# Altium PCB MT6816_Angle_Encoder.PcbDoc
Units mil, origin at the board's own origin, x right, y up, seen from the top; angles counter-clockwise.
Board outline 1496.06 x 1496.06 mil, 2 copper layers (Top Layer, Bottom Layer); 25 components, 21 nets, 90 pads, 18 vias.
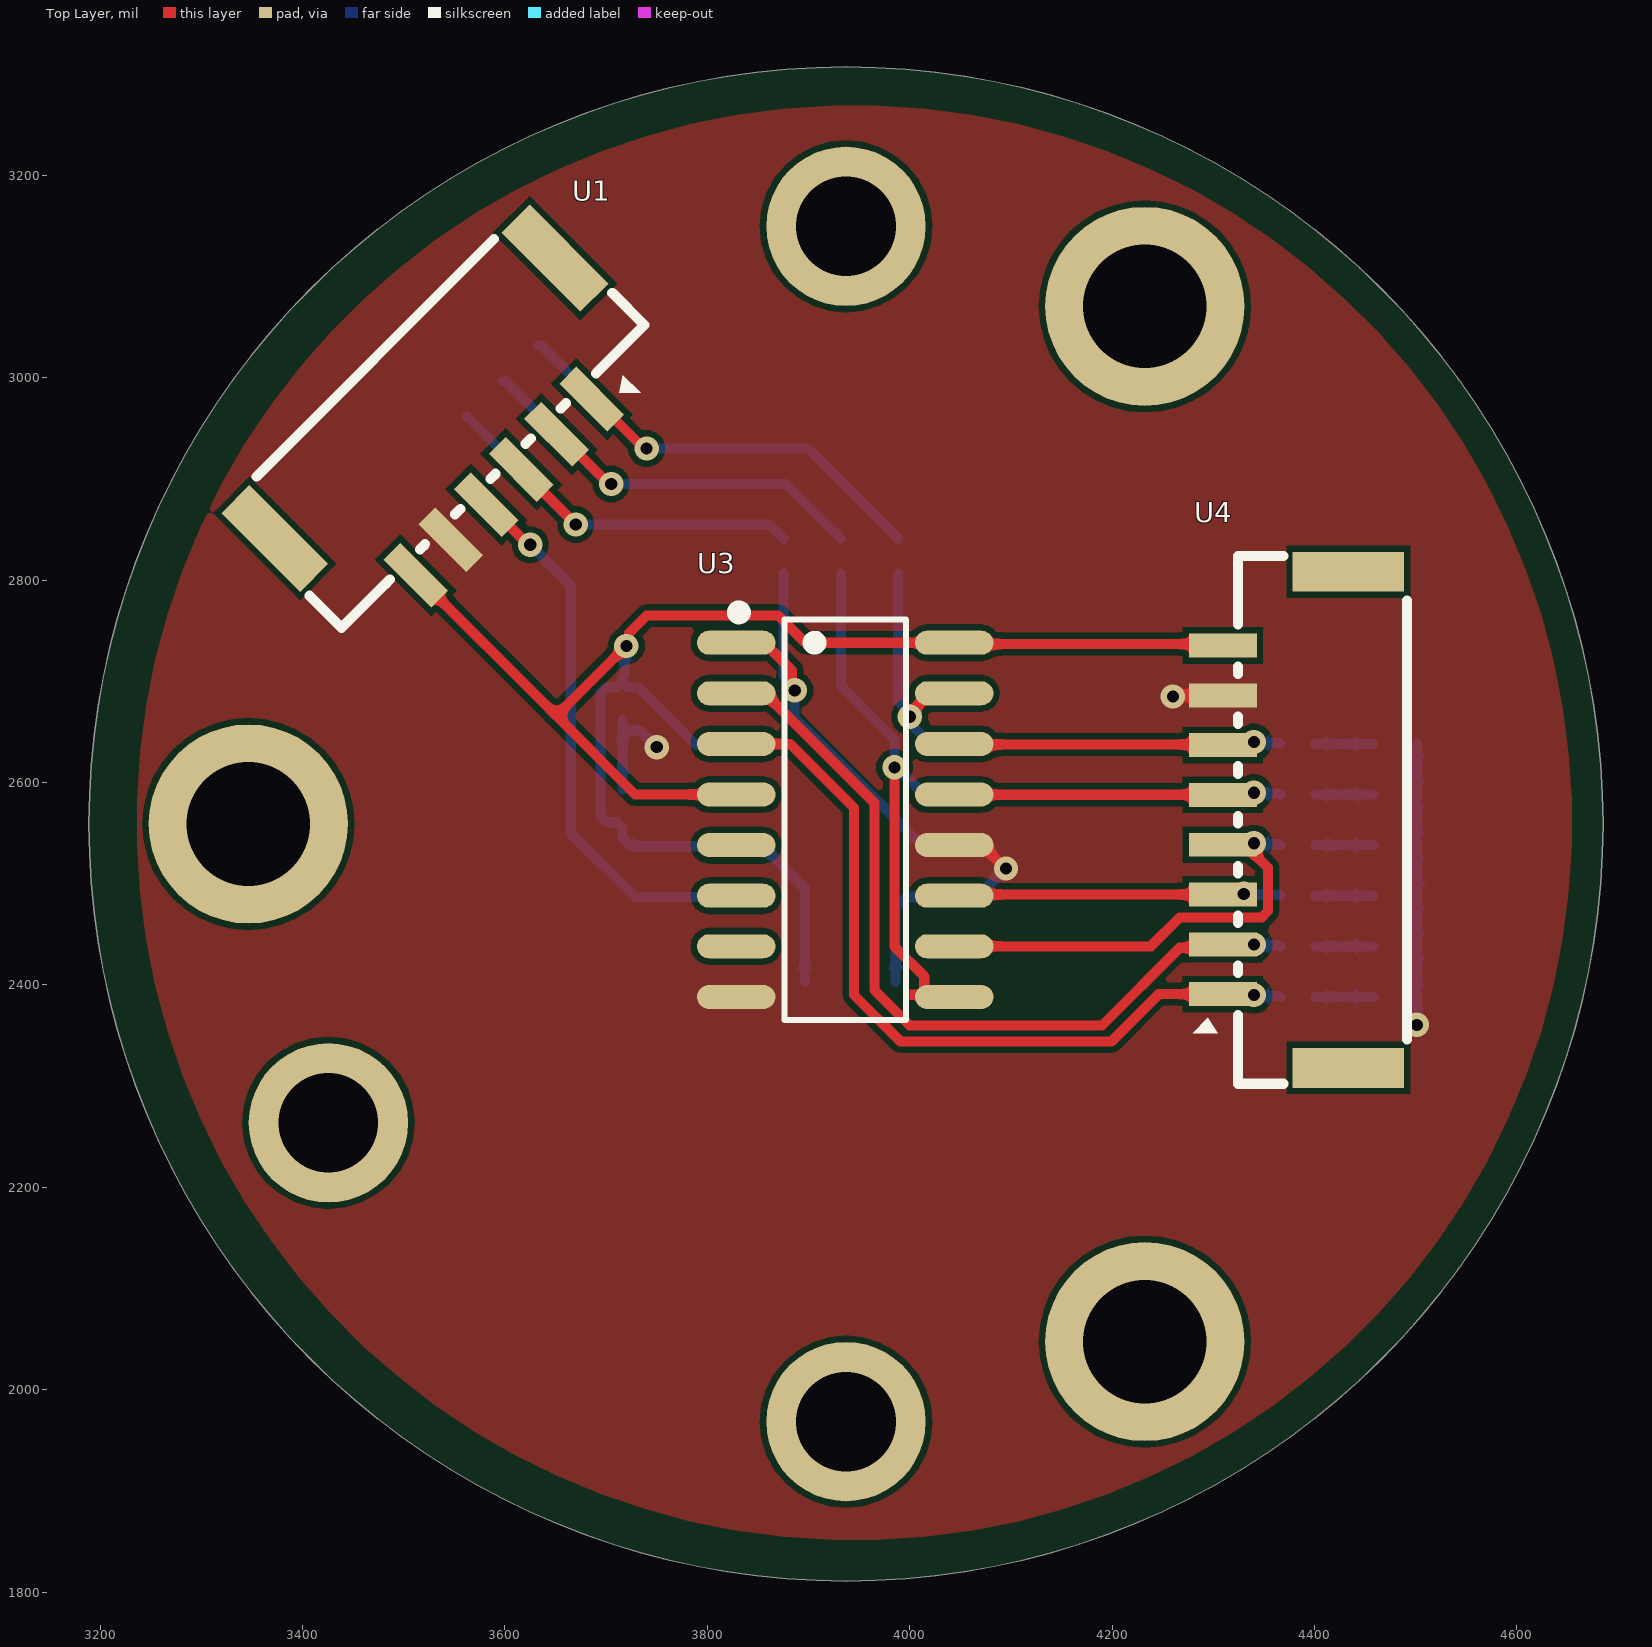
[diagram p0: Top Layer view]
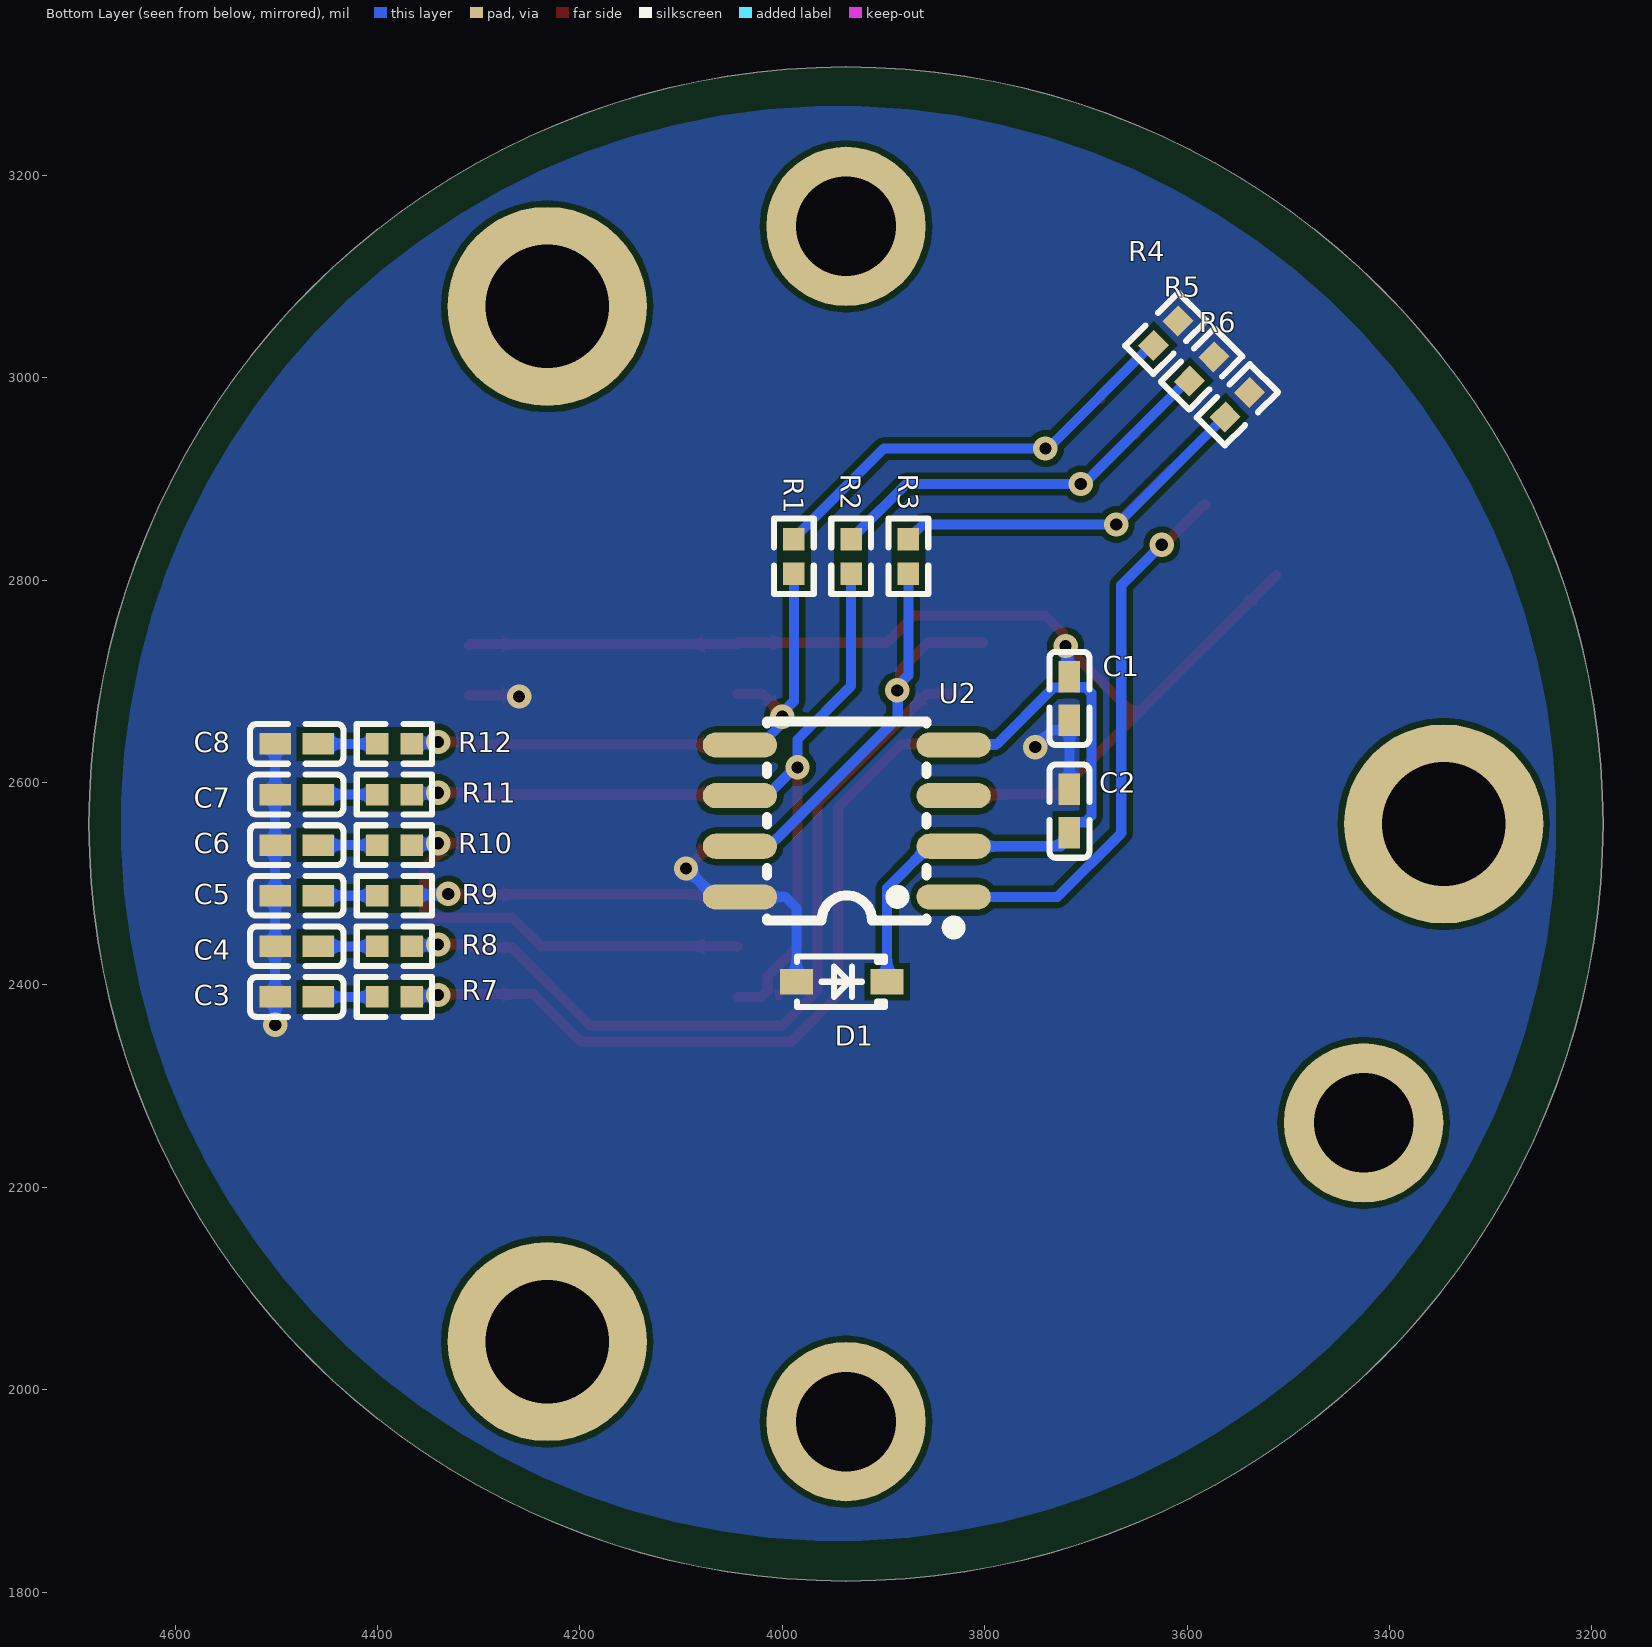
[diagram p1: Bottom Layer view, seen from below]

## Layer stack, top to bottom
Top Solder: solder mask 0.4, Solder Resist, Dk 3.5
Top Layer: signal copper 1.4
Dielectric 1: dielectric 12.6, FR-4, Dk 4.8
Bottom Layer: signal copper 1.4
Bottom Solder: solder mask 0.4, Solder Resist, Dk 3.5

## Board outline
3188.98,2559.06 ccw(c3937.01,2559.06) 3937.01,1811.02 ccw(c3937.01,2559.06) 4685.04,2559.06 ccw(c3937.01,2559.06) 3937.01,3307.09 ccw(c3937.01,2559.06)

## Design rules (kind name [scope] priority, off if disabled: settings)
Clearance [All] p1: gap=6 ignorepadtopadclearanceinfootprint=FALSE except(0: Arc-Hole Track-Hole SMDPad-Hole THPad-Hole Via-Hole Fill-Hole Poly-Hole Region-Hole Text-Hole)
HoleSize [All] p1: absolutevalues=TRUE maxlimit=10000 minlimit=1 maxpercent=80.000 minpercent=20.000
HoleToHoleClearance [All] p1: gap=5 allowstackedmicrovias=TRUE
MinimumSolderMaskSliver [All] p1: minsoldermaskwidth=2
PlaneConnect [All] p1: planeconnectstyle=Direct reliefexpansion=20 reliefentries=4 reliefconductorwidth=10 reliefairgap=10
PolygonConnect [All] p1: connectstyle=Direct reliefconductorwidth=10 reliefentries=4 polygonreliefangle="90 Angle" airgapwidth=10
RoutingVias [All] p1: holewidth=12 width=24 viastyle="Through Hole" minholewidth=12 minwidth=24 maxholewidth=28 maxwidth=50
SilkToSilkClearance [All] p1: silktosilkclearance=0
SilkToSolderMaskClearance [IsPad] p1: minsilkscreentomaskgap=0 clearancetoexposedcopper=TRUE
SolderMaskExpansion [All] p1: expansion=4 istentingtop=FALSE
Width [All] p1: maxlimit=10 minlimit=10 preferedwidth=10
24 further rules are at their usual default settings.

## Components (designator, comment, footprint, x,y, rotation, side; value= is the part's Value field where it differs from the comment)
C1 "0.1uf" C0402 3716.22,2683.19 r90 bottom
C2 "0.1uf" C0402 3716.22,2571.73 r270 bottom
C3 "0.1uf" C0402 4479.72,2388.19 r180 bottom
C4 "0.1uf" C0402 4479.72,2438.19 r180 bottom
C5 "0.1uf" C0402 4479.72,2488.19 r180 bottom
C6 "0.1uf" C0402 4479.72,2538.19 r180 bottom
C7 "0.1uf" C0402 4479.72,2588.19 r180 bottom
C8 "0.1uf" C0402 4479.72,2638.19 r180 bottom
D1 "BZT52C5V6S_C19077441" SOD-323_L1.7-W1.3-LS2.6-RD 3941.22,2403.19 r0 bottom
R1 "0" R0402 3988.54,2823.54 r270 bottom
R2 "0" R0402 3931.97,2823.54 r270 bottom
R3 "0" R0402 3875.4,2823.54 r270 bottom
R4 "10kΩ" R0402 3620.99,3044 r315 bottom
R5 "10kΩ" R0402 3585.64,3008.65 r315 bottom
R6 "10kΩ" R0402 3550.28,2973.29 r315 bottom
R7 "10Ω" R0402 4383.26,2388.19 r180 bottom
R8 "10Ω" R0402 4383.26,2438.19 r180 bottom
R9 "10Ω" R0402 4383.26,2488.19 r180 bottom
R10 "10Ω" R0402 4383.26,2538.19 r180 bottom
R11 "10Ω" R0402 4383.26,2588.19 r180 bottom
R12 "10Ω" R0402 4383.26,2638.19 r180 bottom
U1 "BX-GH1.25-6PWT" CONN-SMD_6P-P1.25_BX-GH1.25-6PWT 3545.18,2945.51 r225 top
U2 "MT6816CT-STD" SOP-8_L4.9-W3.9-P1.27-LS6.0-BL 3936.22,2558.19 r90 bottom locked
U3 "AM26LS31CD" SOIC-16_L9.9-W3.9-P1.27-LS6.0-BL 3936.22,2568.19 r270 top locked
U4 "BX-GH1.25-8PWT" CONN-SMD_8P-P1.25_BX-GH1.25-8PWT 4386.22,2563.19 r90 top

## Footprints (in the part's own frame and the unit in brackets; to place one, negate y for a bottom-side part, rotate by r counter-clockwise, add the part's x,y. Pads: shape width x height; smd on the part's side, far side on the other; paste and mask are expansions set on the pad)
C0402 [mm]
  rect 0.79x0.54 smd paste-100 mask+0.051: 1(-0.545,0) 2(0.545,0)
  silkscreen extent -1.17,-0.5 1.17,0.5
CONN-SMD_6P-P1.25_BX-GH1.25-6PWT [mm]
  rect 0.6x1.7 smd paste+0 mask+0.05: 1(-3.126,1.925) 2(-1.876,1.925) 3(-0.626,1.925) 4(0.624,1.925) 5(1.874,1.925) 6(3.124,1.925)
  rect 1x2.8 smd paste+0 mask+0.05: 7(4.974,-1.225) 8(-4.976,-1.225)
  silkscreen extent -5.37,-2.65 5.37,2.69
CONN-SMD_8P-P1.25_BX-GH1.25-8PWT [mm]
  rect 0.6x1.7 smd paste+0 mask+0.05: 1(-4.375,1.95) 2(-3.125,1.95) 3(-1.875,1.95) 4(-0.625,1.95) 5(0.625,1.95) 6(1.875,1.95) 7(3.125,1.95) 8(4.375,1.95)
  rect 1x2.8 smd paste+0 mask+0.05: 9(6.225,-1.2) 10(-6.225,-1.2)
  silkscreen extent -6.62,-2.67 6.62,2.71
R0402 [mm]
  rect 0.566x0.54 smd paste-100 mask+0.051: 1(-0.433,0) 2(0.433,0)
  silkscreen extent -0.94,-0.5 0.94,0.5
SOD-323_L1.7-W1.3-LS2.6-RD [mm]
  rect 0.83x0.63 smd paste+0 mask+0.05: 1(-1.14,0) 2(1.14,0)
  silkscreen extent -1.08,-0.64 1.13,0.64
SOIC-16_L9.9-W3.9-P1.27-LS6.0-BL [mil]
  oval 23.7x77.6 smd paste+0 mask+2: 1(-169.99,-107.7) 2(-119.99,-107.7) 3(-69.99,-107.7) 4(-19.99,-107.7) 5(30.01,-107.7) 6(80.01,-107.7) 7(130.01,-107.7) 8(180.01,-107.7) 9(180.01,107.7) 10(130.01,107.7) 11(80.01,107.7) 12(30.01,107.7) 13(-19.99,107.7) 14(-69.99,107.7) 15(-119.99,107.7) 16(-169.99,107.7)
  silkscreen extent -206,-111 203,60
SOP-8_L4.9-W3.9-P1.27-LS6.0-BL [mm]
  oval 0.63x1.865 smd paste+0 mask+0.051: 1(-1.807,-2.682) 2(-0.537,-2.682) 3(0.733,-2.682) 4(2.003,-2.682) 5(2.003,2.682) 6(0.733,2.682) 7(-0.537,2.682) 8(-1.807,2.682)
  silkscreen extent -2.72,-2.83 2.6,2

## Part data
C1 C2 C3 C4 C5 C6 C7 C8: library part CC0402KRX6S5BB225
R1 R2 R3 R4 R5 R6 R7 R8 R9 R10 R11 R12: library part PTFR0402B30K0P9

## Free pads (board coordinates)
  round 196.85 hole 122.05: 1(3346.46,2559.06) 1(4232.28,2047.62) 1(4232.28,3070.49)
  round 157.48 hole 98.43: 1(3425.58,2263.78) 1(3937.01,1968.5) 1(3937.01,3149.61)

## Via types
v1: diameter 24, hole 12, Top Layer to Bottom Layer, tented both sides, 18 vias

## Nets (pads, with @x,y where several pads share a name; then routed paths per layer and width w, separated by ;. In a path a pad name is that pad's centre, name@x,y a point inside that pad or via, vN(x,y) a via of type N, cw(c..) or ccw(c..) an arc to the next point about the centre after c; other vN are vias at no path point)
A+: R12.2 U3.14 U4.6 | length 324.8
  Top Layer w10: U3.14 4044.5,2637.59 4308.87,2637.59 U4.6 4312.44,2640 v1(4340,2640)
  Bottom Layer w10: v1(4340,2640) 4340.91,2639.09 4365.31,2639.09 R12.2
A-: R11.2 U3.13 U4.5 | length 324.1
  Top Layer w10: U3.13 4044.11,2587.98 4309.26,2587.98 U4.5 4311.65,2590 v1(4340,2590)
  Bottom Layer w10: v1(4340,2590) 4340.91,2589.09 4365.31,2589.09 R11.2
A/SPI_MOSI: R1.2 U2.5 U3.15 | length 256.4
  Top Layer w10: v1(4000,2665) 4000,2668.1 4020.07,2688.17 U3.15
  Bottom Layer w10: R1.2 3988.54,2680.25 4000,2668.79 v1(4000,2665) ; v1@4002.68,2662.32 4002.68,2655.88 4021.53,2637.04 U2.5 U2.5@4042.85,2636.02
B+: R10.2 U3.10 U4.4 | length 452.3
  Top Layer w10: U3.10 4238.17,2438.17 4266.56,2466.56 4347.47,2466.56 4353.91,2473 4353.91,2515.77 U4.4@4334.84,2534.84 ; U4.4 4310.87,2540 v1(4340,2540)
  Bottom Layer w10: v1(4340,2540) 4340.91,2539.09 4365.31,2539.09 R10.2
B-: R9.2 U3.11 U4.3 | length 323.8
  Top Layer w10: U3.11 4045.11,2489.37 4329.37,2489.37 v1(4330,2490)
  Bottom Layer w10: v1(4330,2490) 4330.91,2489.09 4365.31,2489.09 R9.2
B/SPI_MISO: R2.2 U2.6 U3.9 | length 546.7
  Top Layer w10: v1(3985,2615) 3985,2437.83 4014.35,2408.48 4014.35,2394.5 4020.68,2388.17 U3.9
  Bottom Layer w10: R2.2 3931.97,2695.56 3985,2642.53 v1(3985,2615) 3987.28,2615 4015.24,2587.04 U2.6
GND: C1.1 C2.1 C3.1 C4.1 C5.1 C6.1 C7.1 C8.1 D1.2 R4.1 R5.1 R6.1 U1.5 U2.8 U3.8 U3.12 U4.7 | length 697.6
  Top Layer w10: U3.12 4071.35,2538.17 4094.52,2515 v1(4095,2515) ; v1(4260,2685) 4261.22,2686.22 U4.7
  Bottom Layer w10: C2.1 C1.1@3716.22,2656.81 ; C1.1 C1.1@3716.22,2656.81 ; v1(3750,2635) 3733.44,2651.56 3721.47,2651.56 C1.1@3716.22,2656.81 ; D1.2 3986.1,2476.1 3997.04,2487.04 4066.59,2487.04 4094.55,2515 v1(4095,2515) ; v1(4501.01,2360.62) 4501.01,2388.02 C3.1 C4.1 C5.1 C6.1 C7.1 C8.1
NetC3_2: C3.2 R7.1 | length 58
  Bottom Layer w10: R7.1 C3.2
NetC4_2: C4.2 R8.1 | length 58
  Bottom Layer w10: R8.1 C4.2
NetC5_2: C5.2 R9.1 | length 58
  Bottom Layer w10: R9.1 C5.2
NetC6_2: C6.2 R10.1 | length 58
  Bottom Layer w10: R10.1 C6.2
NetC7_2: C7.2 R11.1 | length 58
  Bottom Layer w10: R11.1 C7.2
NetC8_2: C8.2 R12.1 | length 58
  Bottom Layer w10: R12.1 C8.2
NetR1_1: R1.1 R4.2 U1.1 | length 509.6
  Top Layer w10: U1.1 3688.41,2978.95 3737.36,2930 v1(3740,2930)
  Bottom Layer w10: R4.2 3635.54,3031.96 3737.5,2930 v1(3740,2930) 3899.62,2930 3988.54,2841.08 R1.1
NetR2_1: R2.1 R5.2 U1.2 | length 472.8
  Top Layer w10: U1.2 3653.41,2944.15 3702.56,2895 v1(3705,2895)
  Bottom Layer w10: R5.2 3600.54,2996.6 3702.14,2895 v1(3705,2895) 3877.54,2895 3925.83,2846.71 3926.34,2846.71 3931.44,2841.61 R2.1@3931.44,2841.1
NetR3_1: R3.1 R6.2 U1.3 | length 440
  Top Layer w10: U1.3 3616.18,2909.09 3670,2855.26 v1(3670,2855)
  Bottom Layer w10: R6.2 3563.04,2961.24 3669.29,2855 3860.97,2855 3869.26,2846.71 3869.77,2846.71 3875.4,2841.08 R3.1
SPI_CSN: U1.4 U2.1 | length 553.3
  Top Layer w10: U1.4 3583.41,2874.55 3622.97,2835 v1(3625,2835)
  Bottom Layer w10: v1(3625,2835) 3665,2795 3665,2550 3727.96,2487.04 U2.1
VDD: C1.2 C2.2 D1.1 U1.6 U2.2 U2.4 U3.4 U3.16 U4.8 | length 1778.6
  Top Layer w10: U1.6 3650.87,2665.87 ; U3.4 3728.56,2588.17 3650.87,2665.87 ; U4.8 4308.08,2736.8 4045.29,2736.8 U3.16 3896.83,2738.17 3870,2765 3740,2765 3722.68,2747.68 3722.68,2737.68 3650.87,2665.87
  Bottom Layer w10: v1(3720,2735) 3718.11,2733.11 3718.11,2706.54 C1.2 C1.2@3716.22,2699.72 ; U2.4 3830.01,2637.64 3788.15,2637.64 3731.7,2694.09 3721.85,2694.09 C1.2@3716.22,2699.72 ; D1.1 3896.34,2495.62 3854.92,2537.04 U2.2 3724.53,2537.04 3716.22,2545.35 3716.22,2555.19 3710.59,2560.82 3700.74,2560.82 3694.59,2566.98 3694.59,2688.24 3700.45,2694.09 3710.59,2694.09 C1.2@3716.22,2699.72
Z+: R8.2 U3.2 U4.2 | length 816
  Top Layer w10: U3.2 3856.83,2688.17 3965,2580 3965,2395 4000,2360 4190,2360 4266.84,2436.84 4306.13,2436.84 U4.2 4339.84,2440.16 v1(4340,2440)
  Bottom Layer w10: v1(4340,2440) 4340.91,2439.09 4365.31,2439.09 R8.2
Z-: R7.2 U3.3 U4.1 | length 788.5
  Top Layer w10: U3.3 3881.83,2638.17 3945,2575 3945,2390 3991,2344 4199,2344 4245.94,2390.94 U4.1 4339.06,2390.94 v1(4340,2390)
  Bottom Layer w10: v1(4340,2390) 4340.91,2389.09 4365.31,2389.09 R7.2
Z/SPI_SCLK: R3.2 U2.7 U3.1 | length 468.9
  Top Layer w10: U3.1@3801.57,2738.17 3856.15,2738.17 3883.75,2710.57 3883.75,2693.8 v1(3886.43,2691.12)
  Bottom Layer w10: R3.2 3875.4,2705.94 3886.43,2694.91 v1(3886.43,2691.12) ; v1@3885,2690 3885.88,2689.12 3885.88,2664.12 4005.87,2544.13 4006.42,2544.13 4013.51,2537.04 U2.7
pads on no net: U1.7 U1.8 U2.3 U3.5 U3.6 U3.7 U4.9 U4.10

## Polygon pours and split planes (outlines as drawn)
GND on Top Layer "GND_L01_P000" (solid, remove dead copper, pour order 0): 3236.58,2560.26 cw(c3945.24,2560.26) 3945.24,3268.93 cw(c3945.25,2560.27) 4653.91,2560.26 cw(c3945.25,2560.26) 3945.24,1851.6 cw(c3945.24,2560.26)
GND on Bottom Layer "GND_L02_P001" (solid, remove dead copper, pour order 1): 3235.74,2559.56 cw(c3944.4,2559.56) 3944.4,3268.22 cw(c3944.41,2559.56) 4653.06,2559.56 cw(c3944.41,2559.55) 3944.4,1850.9 cw(c3944.4,2559.55)

## Silkscreen, mask and mechanical layers (free items; w line width, h text height)
Mechanical 1:
  circle w10: c3937.01,2559.06 r748.03